# Altium PCB BSPD23.PcbDoc
Units mm, origin at the board's own origin, x right, y up, seen from the top; angles counter-clockwise.
Board outline 53.47 x 72.77 mm, 2 copper layers (Top Layer, Bottom Layer); 48 components, 38 nets, 189 pads, 47 vias.
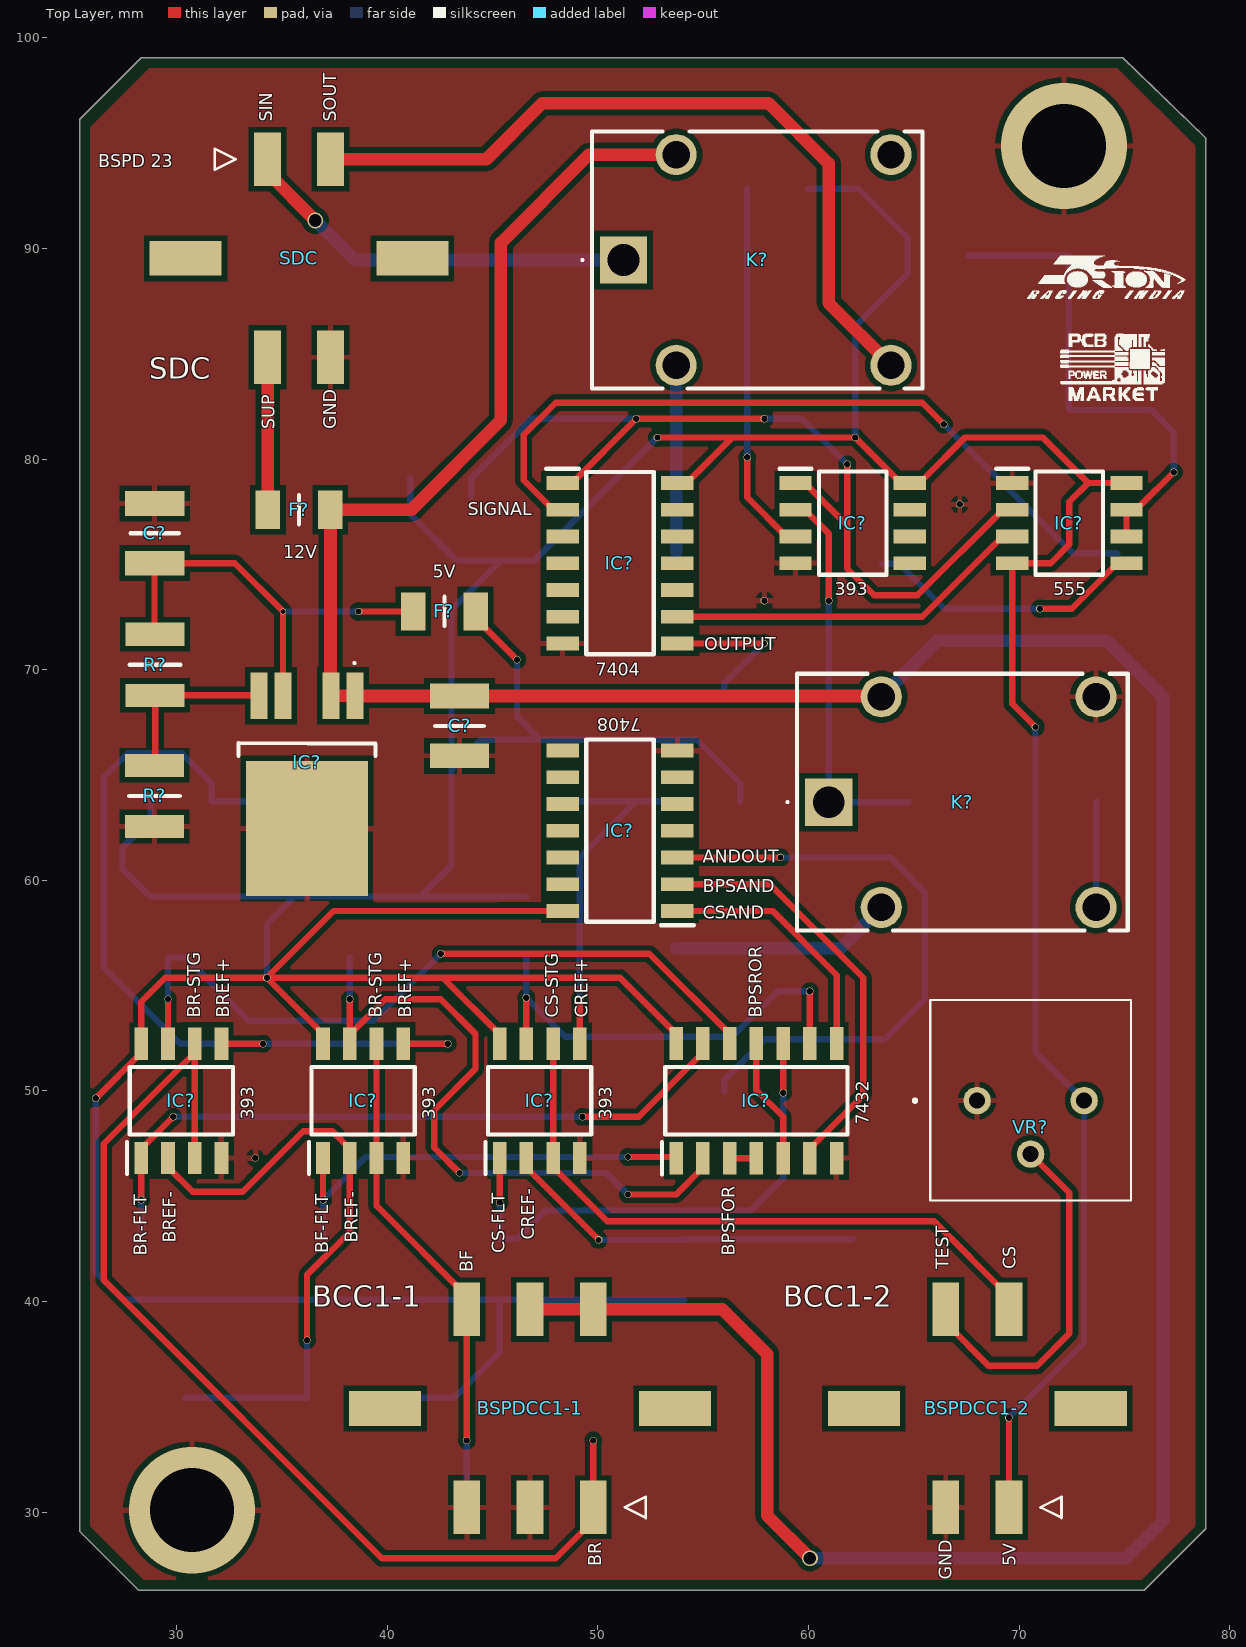
[diagram p0: Top Layer view]
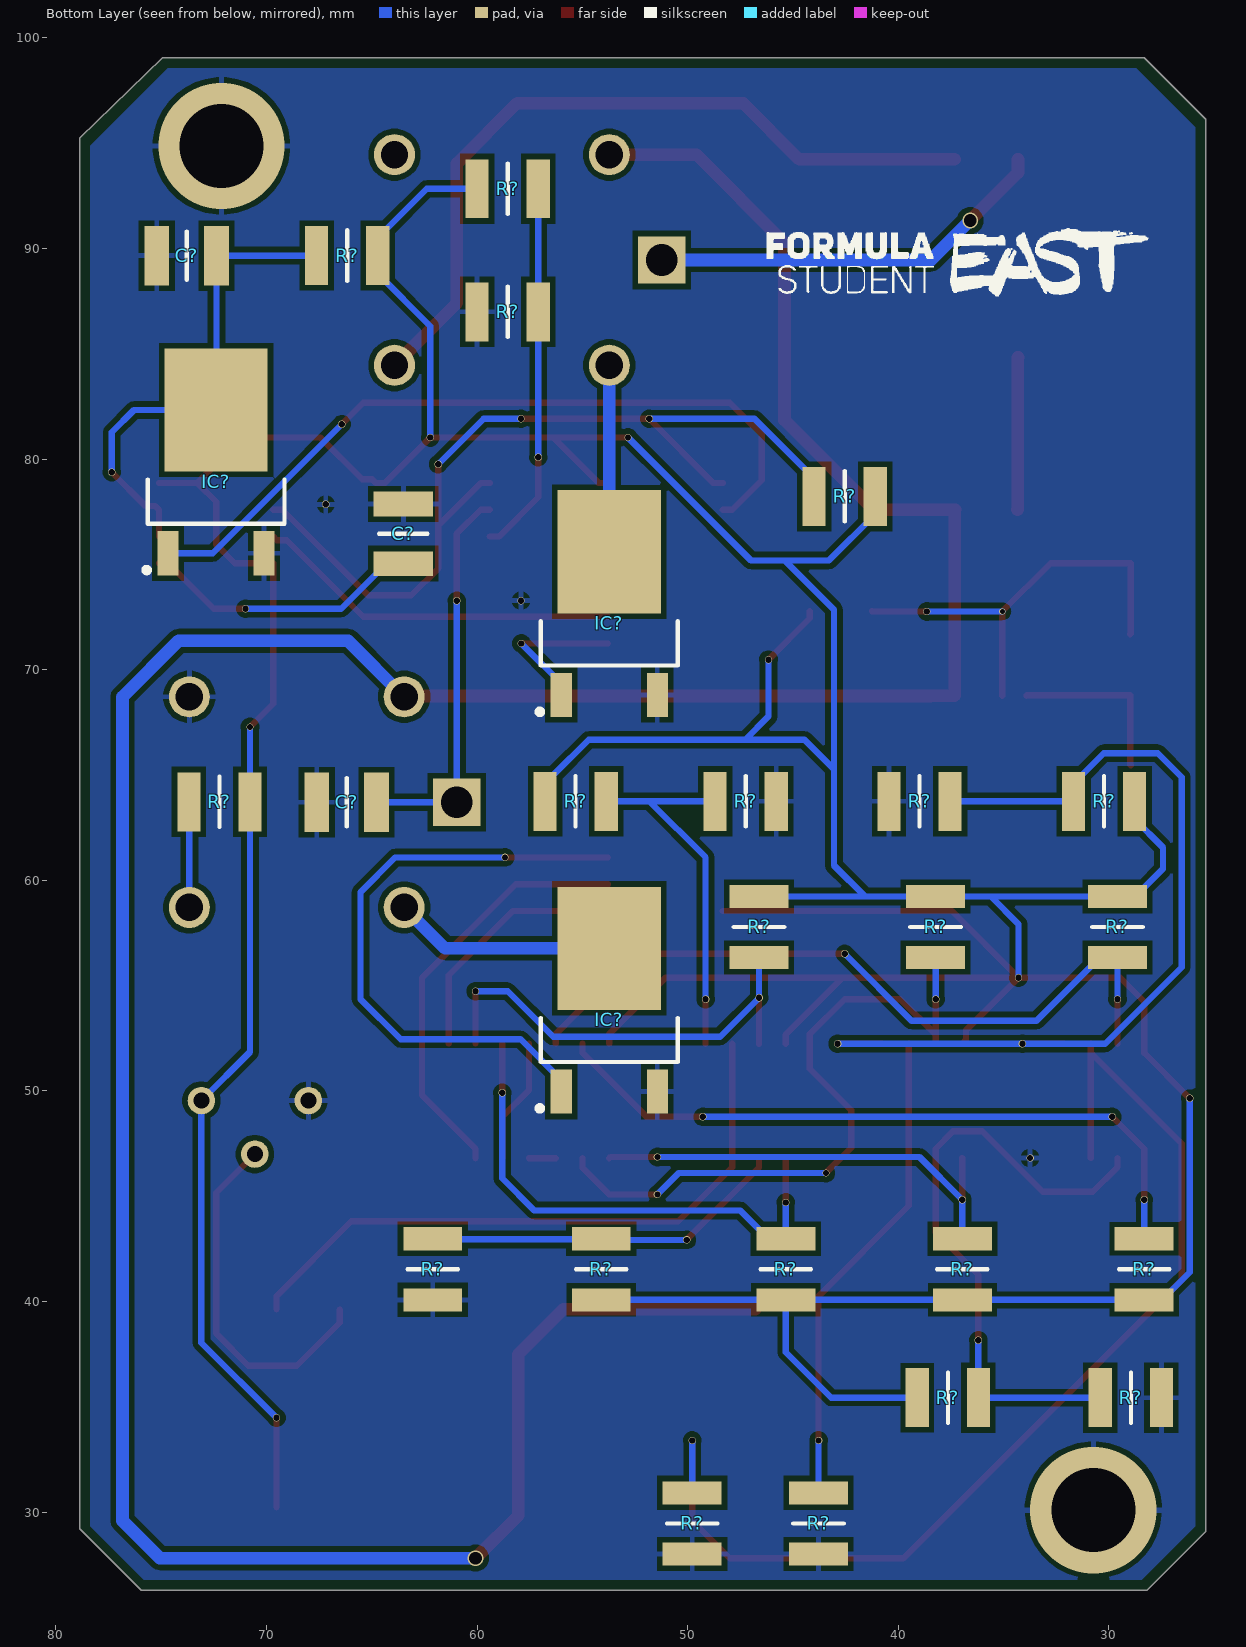
[diagram p1: Bottom Layer view, seen from below]
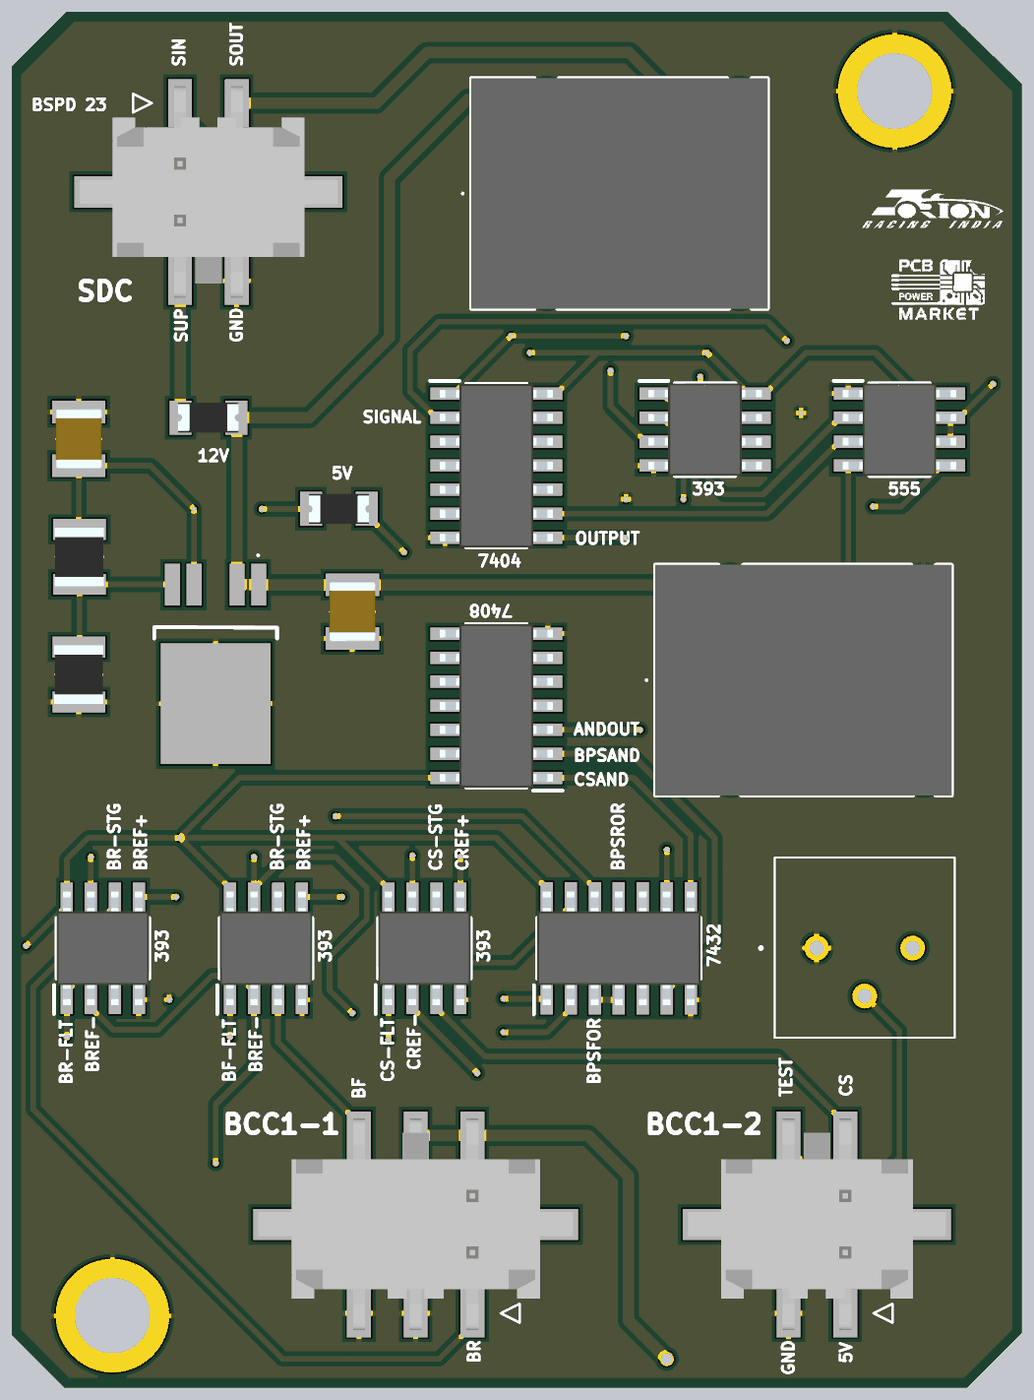
[diagram p2: 3D render of the assembled board from above, using the file's embedded part models]
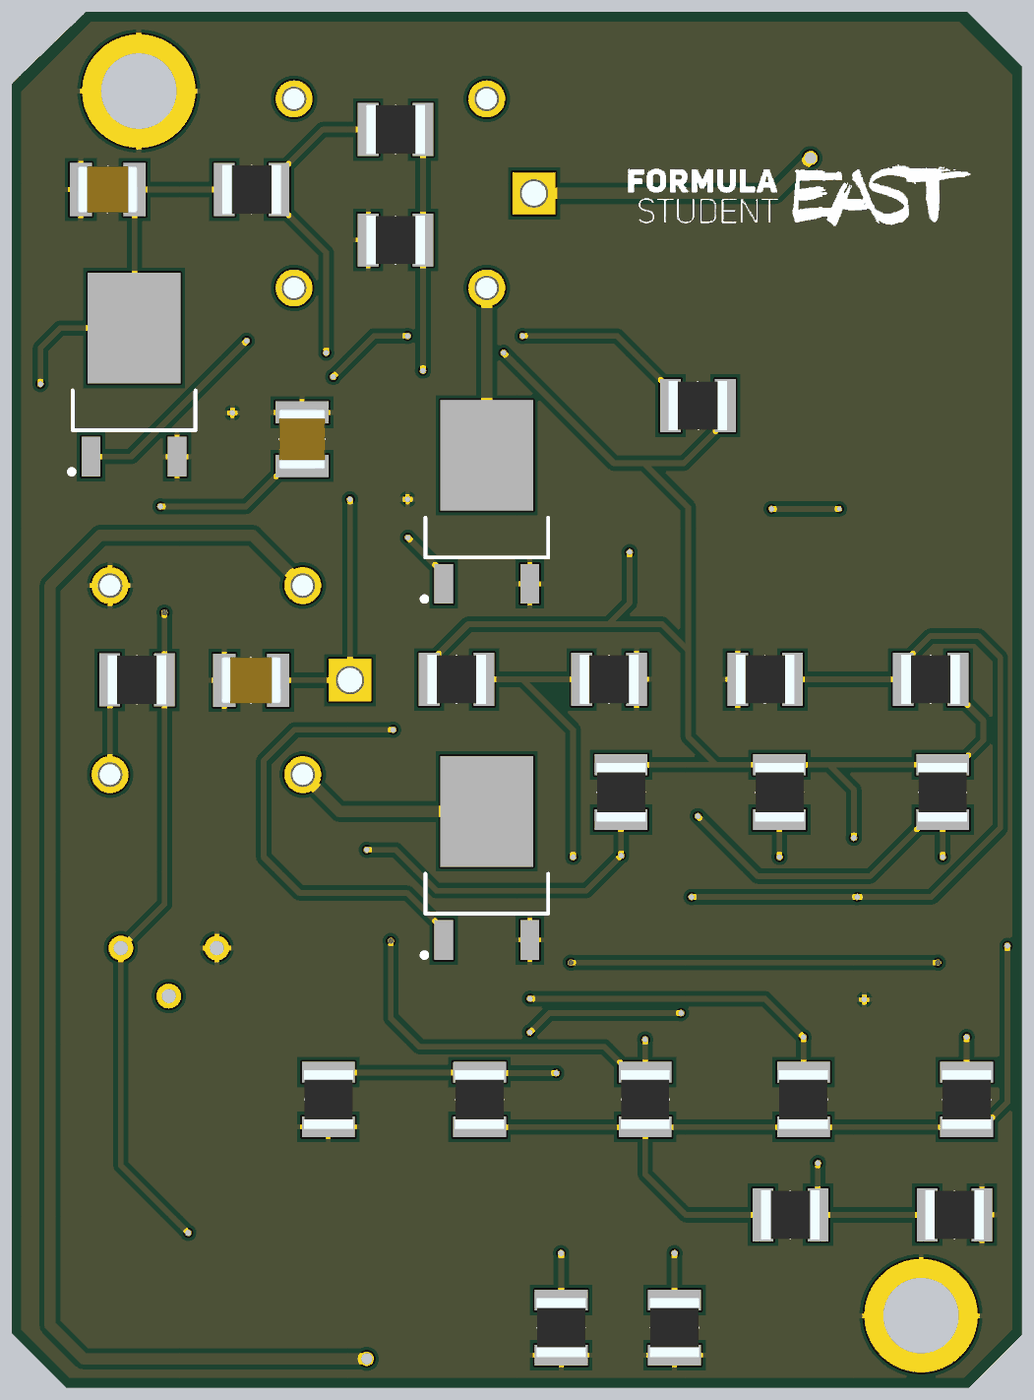
[diagram p3: 3D render of the assembled board from below, using the file's embedded part models]

## Layer stack, top to bottom
Top Solder: solder mask 0.0102, Solder Resist, Dk 3.5
Top Layer: signal copper 0.0356
Dielectric 1: dielectric 0.32, FR-4, Dk 4.8
Bottom Layer: signal copper 0.0356
Bottom Solder: solder mask 0.0102, Solder Resist, Dk 3.5

## Board outline
25.4,96.139 28.321,99.06 74.93,99.06 78.867,95.25 78.867,29.21 75.946,26.289 28.194,26.289 25.4,29.083

## Design rules (kind name [scope] priority, off if disabled: settings)
Clearance [All] p1: gap=0.254 ignorepadtopadclearanceinfootprint=FALSE except(0: Arc-Hole Track-Hole SMDPad-Hole THPad-Hole Via-Hole Fill-Hole Poly-Hole Region-Hole Text-Hole)
PolygonConnect [All] p1: connectstyle=Relief reliefconductorwidth=0.254 reliefentries=4 polygonreliefangle="90 Angle" airgapwidth=0.254
RoutingVias [All] p1: holewidth=0.6 width=0.75 viastyle="Through Hole" minholewidth=0.3 minwidth=0.35 maxholewidth=0.6 maxwidth=0.75
SolderMaskExpansion [All] p1: expansion=0.102 istentingtop=FALSE
Width [All] p1: maxlimit=0.6 minlimit=0.3 preferedwidth=0.6
30 further rules are at their usual default settings.

## Classes and differential pairs
component class BSPD23: BSPDCC1-1 BSPDCC1-2 C? F? IC? K? R? SDC VR?

## Components (designator, comment, footprint, x,y, rotation, side; value= is the part's Value field where it differs from the comment)
BSPDCC1-1 "43045-0619" 43045-06YY_181920 46.784,34.926 r0 top
BSPDCC1-2 "43045-0419" 43045-04YY_181920 68.021,34.925 r0 top
C? "0.1uF" CAPC3225X145N 63.5,76.454 r270 bottom
C? "10uF" CAPC3225X145N 73.787,89.662 r180 bottom
C? "10uF" CAPC3225X145N 43.434,67.333 r270 top
C? "10uF" CAPC3225X145N 66.19,63.71 r180 bottom
C? "10uF" CAPC3225X145N 28.956,76.477 r90 top
F? "NANOSMDC020F-2" NANOSMDC016F2 42.721,72.771 r180 top
F? "NANOSMDC020F-2" NANOSMDC016F2 35.814,77.597 r180 top
IC? "LM393D" SOIC127P600X175-8N 62.103,76.962 r0 top
IC? "SN74HC04DE4" SOIC127P600X175-14N 51.054,75.057 r0 top
IC? "LM393D" SOIC127P600X175-8N 30.226,49.53 r90 top
IC? "TLF1963TEATMA1" TLF1963TEATMA1 36.195,64.516 r180 top
IC? "STD10NF10T4" TO228P972X240-3N 72.39,79.883 r90 bottom
IC? "SN74HC08DE4" SOIC127P600X175-14N 51.054,62.357 r180 top
IC? "LM393D" SOIC127P600X175-8N 38.862,49.53 r90 top
IC? "LM393D" SOIC127P600X175-8N 47.244,49.53 r90 top
IC? "STD10NF10T4" TO228P972X240-3N 53.721,54.319 r90 bottom
IC? "SN74HC32DE4" SOIC127P600X175-14N 57.531,49.53 r90 top
IC? "STD10NF10T4" TO228P972X240-3N 53.721,73.152 r90 bottom
IC? "NE555DRG4" SOIC127P600X175-8N 72.39,76.962 r0 top
K? "SCA20-20-12VDC-C" SCA202012VDCC 60.961,63.713 r180 top
K? "SCA20-20-12VDC-C" SCA202012VDCC 51.221,89.455 r180 top
R? "10K" RESC3126X60N 49.784,29.464 r90 bottom
R? "10K" RESC3126X60N 43.784,29.464 r90 bottom
R? "9.1K" RESC3126X60N 28.956,35.433 r180 bottom
R? "10K" RESC3126X60N 28.321,41.529 r90 bottom
R? "9.1K" RESC3126X60N 55.319,63.754 r0 bottom
R? "4.7K" RESC3126X60N 58.547,92.837 r0 bottom
R? "10K" RESC3126X60N 36.957,41.529 r90 bottom
R? "5.6K" RESC3126X60N 54.102,41.529 r270 bottom
R? "1M" RESC3126X60N 66.167,89.662 r180 bottom
R? "2.7K" RESC3126X60N 38.989,63.754 r0 bottom
R? "3.3K" RESC3126X60N 28.956,64.008 r270 top
R? "5.8K" RESC3126X60N 62.103,41.529 r270 bottom
R? "47K" RESC3126X60N 37.645,35.433 r0 bottom
R? "1M" RESC3126X60N 30.226,63.754 r180 bottom
R? "47K" RESC3126X60N 72.23,63.728 r0 bottom
R? "4.7K" RESC3126X60N 47.244,63.754 r180 bottom
R? "10K" RESC3126X60N 28.981,70.231 r270 top
R? "10K" RESC3126X60N 42.545,78.232 r180 bottom
R? "10K" RESC3126X60N 46.609,57.785 r270 bottom
R? "10K" RESC3126X60N 29.591,57.785 r270 bottom
R? "10K" RESC3126X60N 45.339,41.529 r90 bottom
R? "10K" RESC3126X60N 38.227,57.785 r270 bottom
R? "9.1K" RESC3126X60N 58.547,86.995 r0 bottom
SDC "43045-0419" 43045-04YY_181920 35.814,89.535 r180 top
VR? "3386P-1-103" 3386P1103TLF 68.01,49.54 r180 top

## Footprints (in the part's own frame and the unit in brackets; to place one, negate y for a bottom-side part, rotate by r counter-clockwise, add the part's x,y. Pads: shape width x height; smd on the part's side, far side on the other; paste and mask are expansions set on the pad)
3386P1103TLF [mm]
  round 1.303 hole 0.76: 1(0,0) 2(-2.54,2.54) 3(-5.08,0)
  silkscreen extent -7.3,-4.78 3,4.75
43045-04YY_181920 [mm]
  rect 1.27x2.54 smd: 1(1.5,-4.7) 2(-1.5,-4.7) 3(1.5,4.7) 4(-1.5,4.7)
  rect 3.43x1.65 smd: 5(5.385,0) 6(-5.385,0)
  silkscreen extent 3,-5.2 4,-4.2, body extent -6.83,-5.6 6.83,5.6, height 9.96
43045-06YY_181920 [mm]
  rect 1.27x2.54 smd: 1(3,-4.7) 2(0,-4.7) 3(-3,-4.7) 4(3,4.7) 5(0,4.7) 6(-3,4.7)
  rect 3.43x1.65 smd: 7(6.885,0) 8(-6.885,0)
  silkscreen extent 4.5,-5.2 5.5,-4.2, body extent -8.32,-5.6 8.32,5.6, height 9.96
CAPC3225X145N [mm]
  rect 1.18x2.82 smd: 1(-1.42,0) 2(1.42,0)
  silkscreen extent 0,-1.15 0,1.15, body extent -1.6,-1.25 1.6,1.25, height 1.45
NANOSMDC016F2 [mm]
  rect 1.16x1.81 smd: 1(-1.475,0) 2(1.475,0)
  silkscreen extent 0,-0.69 0,0.69, body extent -1.6,-0.79 1.6,0.79, height 0.82
RESC3126X60N [mm]
  rect 1.1x2.8 smd: 1(-1.45,0) 2(1.45,0)
  silkscreen extent 0,-1.2 0,1.2, body extent -1.55,-1.3 1.55,1.3, height 0.6
SCA202012VDCC [mm]
  rect 2.25x2.25 hole 1.5: 1(0,0)
  round 1.95 hole 1.3: 2(-2.5,5) 3(-12.7,5) 4(-12.7,-5) 5(-2.5,-5)
  silkscreen extent -14.2,-6.1 2,6.1, body extent -14.2,-6.1 1.5,6.1, height 13.8
SOIC127P600X175-8N [mm]
  rect 1.525x0.65 smd: 1(-2.712,1.905) 2(-2.712,0.635) 3(-2.712,-0.635) 4(-2.712,-1.905) 5(2.712,-1.905) 6(2.712,-0.635) 7(2.712,0.635) 8(2.712,1.905)
  silkscreen extent -3.47,-2.45 1.6,2.58, body extent -3,-2.45 3,2.45, height 1.75
SOIC127P600X175-14N [mm]
  rect 1.55x0.65 smd: 1(-2.725,3.81) 2(-2.725,2.54) 3(-2.725,1.27) 4(-2.725,0) 5(-2.725,-1.27) 6(-2.725,-2.54) 7(-2.725,-3.81) 8(2.725,-3.81) 9(2.725,-2.54) 10(2.725,-1.27) 11(2.725,0) 12(2.725,1.27) 13(2.725,2.54) 14(2.725,3.81)
  silkscreen extent -3.5,-4.33 1.6,4.48, body extent -3,-4.33 3,4.33, height 1.75
TLF1963TEATMA1 [mm]
  rect 0.8x2.2 smd: 1(-2.28,-4.25) 2(-1.14,-4.25) 4(1.14,-4.25) 5(2.28,-4.25)
  rect 5.8x6.4 smd: 3(0,2.05)
  silkscreen extent -3.25,-5.85 3.25,-1.4
TO228P972X240-3N [mm]
  rect 2.1x1 smd: 1(-4.35,2.28) 3(-4.35,-2.28)
  rect 5.85x4.9 smd: 4(2.45,0)
  silkscreen extent -5.27,-3.25 -0.85,3.43

## Part data
BSPDCC1-1: "Connector", Manufacturer_Name=Molex, Mouser Part Number=538-43045-0619, Arrow Part Number=43045-0619, Arrow Price/Stock=https://www.arrow.com/en/products/43045-0619/molex, Datasheet Link=https://www.molex.com/pdm_docs/sd/430450218_sd.pdf, Height=9.91mm, Manufacturer_Part_Number=43045-0619, Mouser Price/Stock=https://www.mouser.co.uk/ProductDetail/Molex/43045-0619?qs=KC2ywxza1kr7EVu5MuTw7g%3D%3D
BSPDCC1-2 SDC: "Connector", Manufacturer_Name=Molex, Mouser Part Number=538-43045-0419, Datasheet Link=https://www.molex.com/pdm_docs/sd/430450218_sd.pdf, Height=9.91mm, Manufacturer_Part_Number=43045-0419, Mouser Price/Stock=https://www.mouser.co.uk/ProductDetail/Molex/43045-0419?qs=UeCeOHRHQebVNIQyI9VWWg%3D%3D
C? C? C? C? C?: library part CC1210KKX7R8BB105, "Capacitor", Manufacturer_Name="YAGEO (PHYCOMP)", Mouser Part Number=603-CC121KKX7R8BB105, Arrow Part Number=CC1210KKX7R8BB105, Arrow Price/Stock=https://www.arrow.com/en/products/cc1210kkx7r8bb105/yageo?region=nac, Datasheet Link=https://datasheet.datasheetarchive.com/originals/distributors/Datasheets_SAMA/d9f127a4875522309d99aa7dec79633c.pdf, Height=1.45mm, Manufacturer_Part_Number=CC1210KKX7R8BB105, Mouser Price/Stock=https://www.mouser.com/Search/Refine.aspx?Keyword=603-CC121KKX7R8BB105
F? F?: "Resettable Fuse", Manufacturer_Name=LITTELFUSE, Mouser Part Number=650-NANOSMDC020F-2, Arrow Part Number=NANOSMDC020F-2, Arrow Price/Stock=https://www.arrow.com/en/products/nanosmdc020f-2/littelfuse, Datasheet Link=https://www.littelfuse.com/~/media/electronics/datasheets/resettable_ptcs/littelfuse_ptc_nanosmdc_datasheet.pdf.pdf, Height=1mm, Manufacturer_Part_Number=NANOSMDC020F-2, Mouser Price/Stock=https://www.mouser.co.uk/ProductDetail/Littelfuse/NANOSMDC020F-2?qs=iK0evp%252BCRRU6agwMt7HYjg%3D%3D
IC? IC? IC? IC?: "Integrated Circuit", Manufacturer_Name=STMicroelectronics, Mouser Part Number=511-LM393D, Arrow Part Number=LM393D, Arrow Price/Stock=https://www.arrow.com/en/products/lm393d/stmicroelectronics?region=europe, Datasheet Link=http://www.st.com/st-web-ui/static/active/en/resource/technical/document/datasheet/CD00000465.pdf, Height=1.75mm, Manufacturer_Part_Number=LM393D, Mouser Price/Stock=https://www.mouser.co.uk/ProductDetail/STMicroelectronics/LM393D?qs=htKRmzjvioSpfPyLiLnV1A%3D%3D
IC?: "Integrated Circuit", Manufacturer_Name="Texas Instruments", Mouser Part Number=595-SN74HC04DE4, Arrow Part Number=SN74HC04DE4, Arrow Price/Stock=https://www.arrow.com/en/products/sn74hc04de4/texas-instruments, Datasheet Link=http://www.ti.com/general/docs/suppproductinfo.tsp?distId=10&gotoUrl=http%3A%2F%2Fwww.ti.com%2Flit%2Fgpn%2Fsn74hc04, Height=1.75mm, Manufacturer_Part_Number=SN74HC04DE4, Mouser Price/Stock=https://www.mouser.co.uk/ProductDetail/Texas-Instruments/SN74HC04DE4?qs=mE33ZKBHyE7BqpKQ08Viig%3D%3D
IC?: "Integrated Circuit", Manufacturer_Name=Infineon, Mouser Part Number=726-TLF1963TEATMA1, Arrow Part Number=TLF1963TEATMA1, Arrow Price/Stock=https://www.arrow.com/en/products/tlf1963teatma1/infineon-technologies-ag?region=nac, Datasheet Link=https://www.infineon.com/dgdl/Infineon-TLF1963-DS-v01_00-EN.pdf?fileId=5546d46258fc0bc1015969d2981941e0, Height=2.35mm, Manufacturer_Part_Number=TLF1963TEATMA1, Mouser Price/Stock=https://www.mouser.co.uk/ProductDetail/Infineon-Technologies/TLF1963TEATMA1?qs=SiyfpgnvCZluIGE%2FbZiglw%3D%3D
IC? IC? IC?: "Integrated Circuit", Manufacturer_Name=STMicroelectronics, Mouser Part Number=511-STD10NF10, Arrow Part Number=STD10NF10T4, Arrow Price/Stock=https://www.arrow.com/en/products/std10nf10t4/stmicroelectronics, Datasheet Link=http://www.st.com/web/en/resource/technical/document/datasheet/CD00002133.pdf, Height=2.4mm, Manufacturer_Part_Number=STD10NF10T4, Mouser Price/Stock=https://www.mouser.co.uk/ProductDetail/STMicroelectronics/STD10NF10T4?qs=El1T93pd01%2FBh%252BX9NfIsIQ%3D%3D
IC?: "Integrated Circuit", Manufacturer_Name="Texas Instruments", Mouser Part Number=595-SN74HC08DE4, Arrow Part Number=SN74HC08DE4, Arrow Price/Stock=https://www.arrow.com/en/products/sn74hc08de4/texas-instruments, Datasheet Link=https://www.ti.com/lit/ds/symlink/sn74hc08.pdf?ts=1618731494776&ref_url=https%253A%252F%252Fwww.ti.com%252Fstore%252Fti%252Fen%252Fp%252Fproduct%252F%253Fp%253DSN74HC08D, Height=1.75mm, Manufacturer_Part_Number=SN74HC08DE4, Mouser Price/Stock=https://www.mouser.co.uk/ProductDetail/Texas-Instruments/SN74HC08DE4?qs=AgY10sKTvDKhnfdcduehlw%3D%3D
IC?: "Integrated Circuit", Manufacturer_Name="Texas Instruments", Mouser Part Number=595-SN74HC32DE4, Arrow Part Number=SN74HC32DE4, Arrow Price/Stock=https://www.arrow.com/en/products/sn74hc32de4/texas-instruments, Datasheet Link=https://www.ti.com/lit/ds/symlink/sn54hc32.pdf, Height=1.75mm, Manufacturer_Part_Number=SN74HC32DE4, Mouser Price/Stock=https://www.mouser.co.uk/ProductDetail/Texas-Instruments/SN74HC32DE4?qs=AgY10sKTvDJr47%2F3FTMbxg%3D%3D
IC?: "Integrated Circuit", Manufacturer_Name="Texas Instruments", Mouser Part Number=595-NE555DRG4, Arrow Part Number=NE555DRG4, Arrow Price/Stock=https://www.arrow.com/en/products/ne555drg4/texas-instruments?region=nac, Datasheet Link=http://www.mouser.com/ds/2/405/ne555-557499.pdf, Height=1.75mm, Manufacturer_Part_Number=NE555DRG4, Mouser Price/Stock=https://www.mouser.co.uk/ProductDetail/Texas-Instruments/NE555DRG4?qs=rLYyFdxB%2FmreBHawQCpQ0Q%3D%3D
K? K?: "Relay or Contactor", Manufacturer_Name=LEONE, Datasheet Link=https://www.kuraelectronics.com/new-pdf/SCA%2020.pdf, Height=13.7mm, Manufacturer_Part_Number=SCA20-20-12VDC-C
R? R? R? R? R? R? R? R? R? R? R? R? R? R? R? R? R? R? R? R? R? R? R?: library part RC1210JR-0710KL, "Resistor", Manufacturer_Name="YAGEO (PHYCOMP)", Mouser Part Number=603-RC1210JR-0710KL, Arrow Part Number=RC1210JR-0710KL, Arrow Price/Stock=https://www.arrow.com/en/products/rc1210jr-0710kl/yageo, Datasheet Link=http://www.yageo.com/documents/recent/PYu-RC1210_51_RoHS_L_(4).pdf, Height=0.6mm, Manufacturer_Part_Number=RC1210JR-0710KL, Mouser Price/Stock=https://www.mouser.co.uk/ProductDetail/Yageo/RC1210JR-0710KL?qs=6sj9KdP9svgfoubno5Jb%252BA%3D%3D
VR?: "Variable Resistor", Manufacturer_Name=Bourns, Mouser Part Number=652-3386P-1-103, Arrow Part Number=3386P-1-103, Arrow Price/Stock=https://www.arrow.com/en/products/3386p-1-103/bourns?region=nac, Datasheet Link=https://www.mouser.com/datasheet/2/54/3386-776606.pdf, Height=4.83mm, Manufacturer_Part_Number=3386P-1-103, Mouser Price/Stock=https://www.mouser.co.uk/ProductDetail/Bourns/3386P-1-103?qs=8ovTl4njQkUNVfkrJ%252Bl%2Fgw%3D%3D

## Via types
v1: diameter 0.35, hole 0.3, Top Layer to Bottom Layer, 42 vias
v2: diameter 0.75, hole 0.6, Top Layer to Bottom Layer, 2 vias
v3: diameter 6, hole 4, Top Layer to Bottom Layer, 2 vias
v4: diameter 0.3, hole 0.25, Top Layer to Bottom Layer, 1 vias

## Nets (pads, with @x,y where several pads share a name; then routed paths per layer and width w, separated by ;. In a path a pad name is that pad's centre, name@x,y a point inside that pad or via, vN(x,y) a via of type N, cw(c..) or ccw(c..) an arc to the next point about the centre after c; other vN are vias at no path point)
5V: C?.1@28.956,75.057 F?.2@41.246,72.771 IC?.4@35.055,68.766 R?.1@28.981,71.681 | length 20.6
  Top Layer w0.3: R?.1@28.981,71.681 28.956,71.706 28.956,75.057 32.766,75.057 v4(35.055,72.768) IC?.4@35.055,68.766 ; v1(38.641,72.763) 41.238,72.763 F?.2@41.246,72.771
  Bottom Layer w0.3: v4(35.055,72.768) 38.637,72.768 v1(38.641,72.763)
+5: BSPDCC1-2.1 F?.1@44.196,72.771 IC?.4@69.678,75.057 IC?.8@28.321,52.242 IC?.8@36.957,52.242 IC?.8@45.339,52.242 IC?.8@64.815,78.867 IC?.8@75.102,78.867 IC?.14 R?.1@28.321,40.079 R?.1@29.591,59.235 R?.1@36.957,40.079 R?.1@38.227,59.235 R?.1@45.339,40.079 R?.1@46.609,59.235 R?.1@70.78,63.728 R?.2@28.776,63.754 R?.2@39.095,35.433 R?.2@41.095,78.232 R?.2@54.102,40.079 R?.2@56.769,63.754 R?.2@59.997,92.837 R?.2@64.717,89.662 VR?.3 | length 287.4
  Top Layer w0.3: v1(26.162,49.657) 26.173,49.657 28.321,51.805 28.321,52.242 28.321,54.229 29.464,55.372 v1(34.29,55.372) ; IC?.8@36.957,52.242 36.782,52.417 36.782,52.88 v1(34.29,55.372) ; F?.1@44.196,72.771 44.196,72.446 v1(46.162,70.48) ; IC?.8@45.339,52.242 45.339,52.68 42.647,55.372 ; IC?.14@48.329,58.547 45.217,58.547 45.215,58.544 45.212,58.547 37.465,58.547 v1(34.29,55.372) ; v1(52.832,81.026) 56.388,81.026 ; IC?.14@53.721,52.255 53.721,52.705 51.054,55.372 42.647,55.372 ; IC?.14@53.779,78.867 54.229,78.867 56.388,81.026 ; BSPDCC1-2.1 v1(69.521,34.478) ; v1@70.77,67.29 69.678,68.382 69.678,75.057 71.501,75.057 72.39,75.946 72.39,77.978 73.279,78.867 ; IC?.8@75.102,78.867 73.279,78.867 ; v1(34.29,55.372) 42.647,55.372 ; 56.388,81.026 v1(62.219,81.026) 64.378,78.867 64.815,78.867 64.99,79.042 65.453,79.042 67.437,81.026 71.12,81.026 73.279,78.867
  Bottom Layer w0.3: v1(26.162,49.657) 26.162,41.388 27.471,40.079 28.321,40.079 36.957,40.079 R?.1@45.339,40.079 ; R?.2@28.776,63.754 28.776,62.904 27.432,61.56 27.432,60.544 28.341,59.635 28.741,59.235 29.591,59.235 35.613,59.235 ; v1(34.29,55.372) 34.29,57.912 35.613,59.235 ; R?.2@39.095,35.433 43.18,35.433 45.339,37.592 R?.1@45.339,40.079 ; R?.2@41.095,79.082 41.095,78.232 41.095,77.382 43.293,75.184 45.384,75.184 ; v1(46.162,70.48) 46.162,67.783 47.27,66.675 ; R?.1@46.609,59.235 41.582,59.235 ; v1(52.832,81.026) 46.99,75.184 45.384,75.184 ; R?.2@54.102,40.079 R?.1@45.339,40.079 ; R?.2@56.769,63.754 56.769,64.604 56.369,65.004 54.698,66.675 47.27,66.675 ; R?.2@59.997,92.837 62.392,92.837 64.717,90.512 64.717,89.662 64.717,88.812 62.219,86.314 v1(62.219,81.026) ; v1(69.521,34.478) 73.09,38.047 VR?.3 70.78,51.85 70.78,63.728 v1(70.78,67.28) ; 35.613,59.235 38.227,59.235 41.582,59.235 ; 41.582,59.235 43.053,60.706 43.053,65.278 ; 43.053,65.278 43.053,72.853 45.384,75.184 ; 43.053,65.278 44.45,66.675 47.27,66.675
+12: BSPDCC1-1.4 BSPDCC1-1.5 C?.1@43.434,68.753 F?.1@37.289,77.597 IC?.1@38.475,68.766 IC?.2@37.335,68.766 K?.5 | length 158.2
  Top Layer w0.6: F?.1@37.289,77.597 41.148,77.597 45.4,81.849 45.4,90.27 49.585,94.455 K?.5@53.721,94.455 ; F?.1@37.312,77.574 37.312,68.789 37.335,68.766 38.475,68.766 38.488,68.753 43.434,68.753 63.421,68.753 K?.5@63.461,68.713 ; BSPDCC1-1.5 BSPDCC1-1.4 55.914,39.626 58.039,37.501 58.039,29.845 v2(60.071,27.813)
  Bottom Layer w0.6: v2(60.071,27.813) 75.057,27.813 76.835,29.591 76.835,68.707 74.168,71.374 66.121,71.374 K?.5@63.461,68.713
ANDOUT: IC?.1@56.001,49.969 IC?.3@53.779,61.087 | length 29.2
  Top Layer w0.3: IC?.3@53.779,61.087 v1(58.674,61.087)
  Bottom Layer w0.3: IC?.1@56.001,49.969 56.001,50.519 57.933,52.451 63.627,52.451 65.532,54.356 65.532,59.436 63.881,61.087 v1(58.674,61.087)
BPS+VE: IC?.5@32.131,52.242 IC?.5@40.767,52.242 R?.1@31.676,63.754 R?.1@37.539,63.754 | length 43.9
  Top Layer w0.3: IC?.5@32.131,52.242 v1(34.104,52.242) ; IC?.5@40.767,52.242 v1(42.881,52.242)
  Bottom Layer w0.3: R?.1@37.539,63.754 31.676,63.754 31.676,64.604 30.24,66.04 27.686,66.04 26.543,64.897 26.543,55.88 30.181,52.242 v1(34.104,52.242) v1(42.881,52.242)
BPS-VE: IC?.2@29.591,46.818 IC?.2@38.227,46.818 R?.1@30.406,35.433 R?.1@36.195,35.433 | length 29.5
  Top Layer w0.3: IC?.2@29.591,46.818 29.591,46.38 30.759,45.212 33.142,45.212 36.01,48.08 37.402,48.08 38.227,47.255 38.227,43.297 36.195,41.265 v1(36.195,38.165)
  Bottom Layer w0.3: R?.1@30.406,35.433 36.195,35.433 v1(36.195,38.165)
BPSAND: IC?.2@53.779,59.817 IC?.6@60.071,46.805 | length 20.3
  Top Layer w0.3: IC?.2@53.779,59.817 58.166,59.817 62.611,55.372 62.611,49.795 60.071,47.255 IC?.6@60.071,46.805
BPSF: BSPDCC1-1.6 IC?.3@39.497,46.818 IC?.6@39.497,52.242 R?.2@43.784,30.914 | length 23.1
  Top Layer w0.3: IC?.6@39.497,52.242 39.497,46.818 39.497,44.548 43.784,40.261 BSPDCC1-1.6 v1(43.784,33.401)
  Bottom Layer w0.3: R?.2@43.784,30.914 v1(43.784,33.401)
BPSF1: IC?.1@36.957,46.818 IC?.1@53.721,46.805 R?.2@36.957,42.979 | length 21.5
  Top Layer w0.3: v1(36.957,44.831) IC?.1@36.957,46.818 ; v1(51.435,46.863) 53.663,46.863 IC?.1@53.721,46.805
  Bottom Layer w0.3: R?.2@36.957,42.979 v1(36.957,44.831) 38.989,46.863 v1(51.435,46.863)
BPSF2: IC?.2@54.991,46.805 IC?.7@38.227,52.242 R?.2@38.227,56.335 | length 32.3
  Top Layer w0.3: IC?.7@38.227,52.242 IC?.7@38.227,52.68 ; v1(38.227,54.356) IC?.7@38.227,52.68 ; v1(43.434,46.101) 42.23,47.305 42.23,49.09 44.196,51.056 44.196,52.705 42.545,54.356 39.903,54.356 IC?.7@38.227,52.68 ; v1(51.435,45.085) 53.721,45.085 54.991,46.355 IC?.2@54.991,46.805
  Bottom Layer w0.3: v1(38.227,54.356) R?.2@38.227,56.335 ; v1(43.434,46.101) 50.419,46.101 v1(51.435,45.085)
BPSFOR: IC?.3@56.261,46.805 IC?.4@57.531,46.805 | length 1.3
  Top Layer w0.3: IC?.3@56.261,46.805 IC?.4@57.531,46.805
BPSR: BSPDCC1-1.1 IC?.3@30.861,46.818 IC?.6@30.861,52.242 R?.2@49.784,30.914 | length 53.7
  Top Layer w0.3: IC?.3@30.861,46.818 IC?.6@30.861,51.805 ; IC?.6@30.861,52.242 IC?.6@30.861,51.805 ; v1(49.784,33.401) BSPDCC1-1.1 49.784,29.591 48.006,27.813 39.751,27.813 26.543,41.021 26.543,47.487 IC?.6@30.861,51.805
  Bottom Layer w0.3: R?.2@49.784,30.914 v1(49.784,33.401)
BPSR1: IC?.1@28.321,46.818 IC?.13@54.991,52.255 R?.2@28.321,42.979 | length 33.3
  Top Layer w0.3: v1(28.321,44.831) 28.321,46.818 28.321,47.255 29.834,48.768 v1(29.845,48.768) ; v1(49.276,48.768) 51.954,48.768 54.991,51.805 IC?.13@54.991,52.255
  Bottom Layer w0.3: R?.2@28.321,42.979 v1(28.321,44.831) ; v1(29.845,48.768) v1(49.276,48.768)
BPSR2: IC?.7@29.591,52.242 IC?.12@56.261,52.255 R?.2@29.591,56.335 | length 35.3
  Top Layer w0.3: IC?.7@29.591,52.242 v1(29.591,54.356) ; v1(42.545,56.515) 52.451,56.515 56.261,52.705 IC?.12@56.261,52.255
  Bottom Layer w0.3: v1(29.591,54.356) 29.591,56.335 30.441,56.335 33.436,53.34 39.37,53.34 v1(42.545,56.515)
BPSROR: IC?.5@58.801,46.805 IC?.11@57.531,52.255 | length 6
  Top Layer w0.3: IC?.11@57.531,52.255 57.531,50.038 58.801,48.768 IC?.5@58.801,46.805
BSPDTEST: BSPDCC1-2.4 VR?.2 | length 17.3
  Top Layer w0.3: BSPDCC1-2.4 66.521,38.99 68.554,36.957 70.866,36.957 72.39,38.481 72.39,45.16 VR?.2
CS: BSPDCC1-2.3 IC?.3@47.879,46.818 IC?.6@47.879,52.242 | length 30.7
  Top Layer w0.3: IC?.6@47.879,52.242 47.879,46.818 47.879,46.38 50.444,43.815 65.966,43.815 69.521,40.26 BSPDCC1-2.3
CS1: IC?.1@45.339,46.818 IC?.10@58.801,52.255 R?.2@45.339,42.979 | length 24.9
  Top Layer w0.3: v1(45.339,44.704) IC?.1@45.339,46.818 ; v1(58.801,49.911) IC?.10@58.801,52.255
  Bottom Layer w0.3: v1(45.339,44.704) 45.339,42.979 46.189,42.979 46.589,43.379 46.589,43.414 47.498,44.323 57.277,44.323 58.801,45.847 v1(58.801,49.911)
CS2: IC?.7@46.609,52.242 IC?.9@60.071,52.255 R?.2@46.609,56.335 | length 21.7
  Top Layer w0.3: IC?.7@46.609,52.242 v1(46.609,54.43) ; IC?.9@60.071,52.255 v1(60.071,54.737)
  Bottom Layer w0.3: R?.2@46.609,56.335 v1(46.609,54.43) 48.461,52.578 56.388,52.578 58.547,54.737 v1(60.071,54.737)
CS+VE: IC?.5@49.149,52.242 R?.1@48.694,63.754 R?.1@53.869,63.754 | length 17.8
  Top Layer w0.3: IC?.5@49.149,52.242 v1(49.149,54.356)
  Bottom Layer w0.3: R?.1@48.694,63.754 51.816,63.754 ; v1(49.149,54.356) 49.149,61.087 51.816,63.754 ; R?.1@53.869,63.754 51.816,63.754
CS-VE: IC?.2@46.609,46.818 R?.1@54.102,42.979 R?.1@62.103,42.979 | length 17.4
  Top Layer w0.3: IC?.2@46.609,46.818 46.609,46.38 50.028,42.961 50.028,42.936 v1(50.038,42.926)
  Bottom Layer w0.3: v1(50.038,42.926) 54.049,42.926 R?.1@54.102,42.979 ; R?.1@54.076,42.952 62.077,42.952 R?.1@62.103,42.979
CSAND: IC?.1@53.779,58.547 IC?.8@61.341,52.255 | length 12.1
  Top Layer w0.3: IC?.1@53.779,58.547 58.293,58.547 61.341,55.499 IC?.8@61.341,52.255
DELAY: C?.2@64.77,63.71 IC?.2@59.391,77.597 K?.1@60.961,63.713 | length 18.6
  Top Layer w0.3: IC?.2@59.391,77.597 59.828,77.597 60.96,76.465 v1(60.96,73.279)
  Bottom Layer w0.3: K?.1@60.961,63.713 60.964,63.71 C?.2@64.77,63.71 ; K?.1@60.96,63.715 v1(60.96,73.279)
GND: BSPDCC1-1.2 BSPDCC1-1.3 BSPDCC1-2.2 C?.1@63.5,77.874 C?.1@67.61,63.71 C?.1@75.207,89.662 C?.2@28.956,77.897 C?.2@43.434,65.913 IC?.1@69.678,78.867 IC?.3@36.195,62.466 IC?.3@51.441,49.969 IC?.3@51.441,68.802 IC?.3@70.11,75.533 IC?.4@32.131,46.818 IC?.4@40.767,46.818 IC?.4@49.149,46.818 IC?.4@59.391,75.057 IC?.7@48.329,71.247 IC?.7@53.779,66.167 IC?.7@61.341,46.805 K?.4@73.661,68.713 R?.1@43.784,28.014 R?.1@49.784,28.014 R?.2@27.506,35.433 R?.2@28.956,62.558 R?.2@40.439,63.754 R?.2@45.794,63.754 R?.2@59.997,86.995 R?.2@62.103,40.079 SDC.4 VR?.1
  other v1: 33.741,46.818 57.912,73.279 67.183,77.851
  other v3: 30.734,30.099 72.136,94.869
LVMS: F?.2@34.339,77.597 SDC.3 | length 7.2
  Top Layer w0.6: SDC.3 34.326,84.822 34.326,77.609 F?.2@34.339,77.597
NetC?_2: C?.2@63.5,75.034 IC?.5@75.102,75.057 | length 13.4
  Top Layer w0.3: v1(70.993,72.898) 72.506,72.898 74.665,75.057 IC?.5@75.102,75.057
  Bottom Layer w0.3: C?.2@63.5,75.034 64.32,75.034 66.456,72.898 v1(70.993,72.898)
NetIC?_3: IC?.3@59.391,76.327 R?.1@57.097,86.995 R?.1@57.097,92.837 | length 17.7
  Top Layer w0.3: v1(57.097,80.084) 57.097,78.183 58.953,76.327 IC?.3@59.391,76.327
  Bottom Layer w0.3: v1(57.097,80.084) 57.097,86.995 R?.1@57.097,92.837
NetIC?_4: IC?.4@53.721,75.602 K?.2@53.721,84.455 | length 8.9
  Bottom Layer w0.6: IC?.4@53.721,75.602 K?.2@53.721,84.455
NetIC?_5: IC?.5@33.915,68.766 R?.1@28.956,65.458 R?.2@28.981,68.781 | length 8.3
  Top Layer w0.3: R?.1@28.956,65.458 28.981,65.483 28.981,68.781 33.9,68.781 IC?.5@33.915,68.766
NetK?_3: K?.3@73.661,58.713 R?.2@73.68,63.728 | length 5
  Bottom Layer w0.3: K?.3@73.661,58.713 73.661,63.71 R?.2@73.68,63.73
OUT: IC?.3@69.678,76.327 IC?.9@53.779,72.517 | length 17.5
  Top Layer w0.3: IC?.9@53.779,72.517 65.405,72.517 69.04,76.152 69.503,76.152 IC?.3@69.678,76.327
OUTNOT: IC?.1@56.001,68.802 IC?.8@53.779,71.247 | length 7.3
  Top Layer w0.3: IC?.8@53.779,71.247 v1(57.896,71.247)
  Bottom Layer w0.3: IC?.1@56.001,68.802 56.001,69.352 v1(57.896,71.247)
SDC_IN: K?.1@51.221,89.455 SDC.1 | length 19.3
  Top Layer w0.6: SDC.1 34.314,93.6 v2(36.585,91.329)
  Bottom Layer w0.6: v2(36.585,91.329) 38.459,89.455 K?.1@51.221,89.455
SDC_OUT: K?.3@63.921,84.455 SDC.2 | length 36.7
  Top Layer w0.6: SDC.2 44.705,94.235 47.371,96.901 58.099,96.901 60.96,94.04 60.96,87.416 K?.3@63.921,84.455
SIG: IC?.1@48.329,78.867 IC?.1@59.391,78.867 IC?.2@69.678,77.597 R?.1@43.995,78.232 | length 43.8
  Top Layer w0.3: IC?.1@48.329,78.867 48.779,78.867 v1(51.827,81.915) v1(57.912,81.915) ; IC?.1@59.391,78.867 59.828,78.867 61.849,76.846 ; v1(61.849,79.756) 61.849,76.846 ; IC?.2@69.678,77.597 69.24,77.597 65.176,73.533 63.119,73.533 61.849,74.803 61.849,76.846
  Bottom Layer w0.3: R?.1@43.995,78.232 43.995,79.082 46.828,81.915 v1(51.827,81.915) ; v1(57.912,81.915) 59.69,81.915 v1(61.849,79.756)
SIGNOT: IC?.1@74.67,75.533 IC?.2@48.329,77.597 | length 36.4
  Top Layer w0.3: IC?.2@48.329,77.597 47.879,77.597 46.482,78.994 46.482,81.153 48.006,82.677 65.405,82.677 v1(66.421,81.661)
  Bottom Layer w0.3: v1(66.421,81.661) 72.549,75.533 IC?.1@74.67,75.533
X: C?.2@72.367,89.662 IC?.4@72.39,82.333 IC?.6@75.102,76.327 IC?.7@75.102,77.597 R?.1@67.617,89.662 | length 23.6
  Top Layer w0.3: IC?.6@75.102,76.327 75.102,77.597 75.277,77.772 75.74,77.772 v1(77.343,79.375)
  Bottom Layer w0.3: R?.1@67.617,89.662 72.367,89.662 72.367,82.356 72.39,82.333 76.29,82.333 77.343,81.28 v1(77.343,79.375)
Y: IC?.4@53.721,56.769 K?.2@63.461,58.713 | length 10.5
  Bottom Layer w0.6: IC?.4@53.721,56.769 61.516,56.769 K?.2@63.461,58.713
pads on no net: BSPDCC1-1.7 BSPDCC1-1.8 BSPDCC1-2.5 BSPDCC1-2.6 IC?.3@48.329,76.327 IC?.4@48.329,75.057 IC?.4@53.779,62.357 IC?.5@48.329,73.787 IC?.5@53.779,63.627 IC?.5@64.815,75.057 IC?.6@48.329,72.517 IC?.6@53.779,64.897 IC?.6@64.815,76.327 IC?.7@64.815,77.597 IC?.8@48.329,66.167 IC?.9@48.329,64.897 IC?.10@48.329,63.627 IC?.10@53.779,73.787 IC?.11@48.329,62.357 IC?.11@53.779,75.057 IC?.12@48.329,61.087 IC?.12@53.779,76.327 IC?.13@48.329,59.817 IC?.13@53.779,77.597 K?.4@63.921,94.455 SDC.5 SDC.6

## Polygon pours and split planes (outlines as drawn)
GND on Bottom Layer "NONET_L-01_P-001" (solid, pour order 1): 28.702,98.552 74.676,98.552 78.359,94.869 78.359,29.337 75.819,26.797 28.448,26.797 25.908,29.337 25.908,95.758
GND on Top Layer "NONET_L-01_P-001" (solid, pour order 2): 74.676,98.552 78.359,94.869 78.359,29.337 75.819,26.797 28.448,26.797 25.908,29.337 25.908,95.758 28.702,98.552 33.528,98.552

## Silkscreen, mask and mechanical layers (free items; w line width, h text height)
Top Overlay:
  drawing of 48 lines, arcs and shapes, not listed
  text "SIN" at 34.544,96.012 h0.6 r90
  text "SOUT" at 37.592,96.012 h0.6 r90
  text "BSPD 23" at 26.289,93.853 h0.6
  text "SDC" at 28.702,83.82 h1
  text "SUP" at 34.671,81.407 h0.6 r90
  text "GND" at 37.592,81.407 h0.6 r90
  text "SIGNAL" at 43.815,77.343 h0.6
  text "12V" at 35.074,75.294 h0.6
  text "5V" at 42.174,74.364 h0.6
  text "393" at 61.254,73.533 h0.6
  text "555" at 71.628,73.533 h0.6
  text "OUTPUT" at 55.062,70.922 h0.6
  text "7404" at 49.911,69.723 h0.6
  text "7408" at 52.07,67.691 h0.6 r180
  text "ANDOUT" at 54.991,60.833 h0.6
  text "BPSAND" at 54.991,59.436 h0.6
  text "CSAND" at 54.991,58.166 h0.6
  text "BR-STG" at 31.115,53.467 h0.6 r90
  text "BREF+" at 32.512,53.467 h0.6 r90
  text "BR-STG" at 39.751,53.467 h0.6 r90
  text "BREF+" at 41.148,53.467 h0.6 r90
  text "CS-STG" at 48.133,53.467 h0.6 r90
  text "CREF+" at 49.53,53.467 h0.6 r90
  text "BPSROR" at 57.785,53.467 h0.6 r90
  text "393" at 33.655,48.641 h0.6 r90
  text "393" at 42.291,48.641 h0.6 r90
  text "393" at 50.673,48.641 h0.6 r90
  text "7432" at 62.865,48.387 h0.6 r90
  text "CREF-" at 46.99,42.926 h0.6 r90
  text "BREF-" at 29.972,42.799 h0.6 r90
  text "BREF-" at 38.608,42.799 h0.6 r90
  text "BF-FLT" at 37.211,42.291 h0.6 r90
  text "CS-FLT" at 45.593,42.291 h0.6 r90
  text "BR-FLT" at 28.575,42.164 h0.6 r90
  text "BPSFOR" at 56.515,42.164 h0.6 r90
  text "TEST" at 66.675,41.529 h0.6 r90
  text "CS" at 69.85,41.529 h0.6 r90
  text "BF" at 44.069,41.402 h0.6 r90
  text "BCC1-1" at 36.449,39.751 h1
  text "BCC1-2" at 58.801,39.751 h1
  text "BR" at 50.165,27.432 h0.6 r90
  text "5V" at 69.85,27.432 h0.6 r90
  text "GND" at 66.802,26.797 h0.6 r90
Bottom Overlay:
  drawing of 17 lines, arcs and shapes, not listed